# EAGLE board Arduino (EAGLE 9.6.2)

Size 100 x 80 mm. Coordinates in mm from the lower left corner, seen from the top.
Outline: 0,0 100,0 100,80 0,80 0,0
Copper layers (1*16): Top 0.035mm / dielectric 1.5mm / Bottom 0.035mm
Design rules "default": minimum track width 6mil, minimum drill 0.35mm, track to track 6mil, track to pad 6mil, pad to pad 6mil, via to via 6mil, smd to smd 6mil, copper to edge 40mil, drill to drill 6mil, minimum pad ring 10mil, minimum via ring 8mil, stop-mask expansion 4mil, vias tented up to drill 0mil, thermal gap 10mil
Net classes: 0 default: width 0.15 mm, drill 0.3 mm, clearance 0.15 mm

## Footprints (pad centres in the part's own frame; a part is rotated, then mirrored left to right if it is on the bottom)
1X08 = drill 1.016 long: 1 -8.89,0; 2 -6.35,0; 3 -3.81,0; 4 -1.27,0; 5 1.27,0; 6 3.81,0; 7 6.35,0; 8 8.89,0
C0603-ROUND = smd 0.898 x 1.1: 1 -0.889,0; 2 0.889,0
C0603 = smd 1.1 x 1: 1 -0.85,0; 2 0.85,0
SMB = smd 2.4 x 2.4: A 2.2,0; C -2.2,0
L1812 = smd 1.9 x 3.4: 1 -1.95,0; 2 1.95,0
SJ = smd 1.168 x 1.6: 1 -0.762,0; 2 0.762,0
SOT223 = smd 1.219 x 2.235: 1 -2.311,-3.099; 2 0,-3.099; 3 2.311,-3.099 | smd 3.6 x 2.2: 4 0,3.099
DPACK = smd 1 x 1.6: 1 -2.28,-4.8; 3 2.28,-4.8 | smd 5.4 x 6.2: 2 0,2.5
TQFP100 = smd 1.5 x 0.35: 1 -8,6; 2 -8,5.5; 3 -8,5; 4 -8,4.5; 5 -8,4; 6 -8,3.5; 7 -8,3; 8 -8,2.5; 9 -8,2; 10 -8,1.5; 11 -8,1; 12 -8,0.5; 13 -8,0; 14 -8,-0.5; 15 -8,-1; 16 -8,-1.5; 17 -8,-2; 18 -8,-2.5; 19 -8,-3; 20 -8,-3.5; 21 -8,-4; 22 -8,-4.5; 23 -8,-5; 24 -8,-5.5; 25 -8,-6; 51 8,-6; 52 8,-5.5; 53 8,-5; 54 8,-4.5; 55 8,-4; 56 8,-3.5; 57 8,-3; 58 8,-2.5; 59 8,-2; 60 8,-1.5; 61 8,-1; 62 8,-0.5; 63 8,0; 64 8,0.5; 65 8,1; 66 8,1.5; 67 8,2; 68 8,2.5; 69 8,3; 70 8,3.5; 71 8,4; 72 8,4.5; 73 8,5; 74 8,5.5; 75 8,6 | smd 0.35 x 1.5: 26 -6,-8; 27 -5.5,-8; 28 -5,-8; 29 -4.5,-8; 30 -4,-8; 31 -3.5,-8; 32 -3,-8; 33 -2.5,-8; 34 -2,-8; 35 -1.5,-8; 36 -1,-8; 37 -0.5,-8; 38 0,-8; 39 0.5,-8; 40 1,-8; 41 1.5,-8; 42 2,-8; 43 2.5,-8; 44 3,-8; 45 3.5,-8; 46 4,-8; 47 4.5,-8; 48 5,-8; 49 5.5,-8; 50 6,-8; 76 6,8; 77 5.5,8; 78 5,8; 79 4.5,8; 80 4,8; 81 3.5,8; 82 3,8; 83 2.5,8; 84 2,8; 85 1.5,8; 86 1,8; 87 0.5,8; 88 0,8; 89 -0.5,8; 90 -1,8; 91 -1.5,8; 92 -2,8; 93 -2.5,8; 94 -3,8; 95 -3.5,8; 96 -4,8; 97 -4.5,8; 98 -5,8; 99 -5.5,8; 100 -6,8
QFN32 = smd 0.6 x 0.3: 1 -2.3,1.75; 2 -2.3,1.25; 3 -2.3,0.75; 4 -2.3,0.25; 5 -2.3,-0.25; 6 -2.3,-0.75; 7 -2.3,-1.25; 8 -2.3,-1.75; 17 2.3,-1.75; 18 2.3,-1.25; 19 2.3,-0.75; 20 2.3,-0.25; 21 2.3,0.25; 22 2.3,0.75; 23 2.3,1.25; 24 2.3,1.75 | smd 0.3 x 0.6: 9 -1.75,-2.3; 10 -1.25,-2.3; 11 -0.75,-2.3; 12 -0.25,-2.3; 13 0.25,-2.3; 14 0.75,-2.3; 15 1.25,-2.3; 16 1.75,-2.3; 25 1.75,2.3; 26 1.25,2.3; 27 0.75,2.3; 28 0.25,2.3; 29 -0.25,2.3; 30 -0.75,2.3; 31 -1.25,2.3; 32 -1.75,2.3 | smd 3.2 x 3.2: EXP 0,0
SO08 = smd 0.6 x 2.2: 1 -1.905,-2.6; 2 -0.635,-2.6; 3 0.635,-2.6; 4 1.905,-2.6; 5 1.905,2.6; 6 0.635,2.6; 7 -0.635,2.6; 8 -1.905,2.6
SOT23-DBV = smd 0.55 x 1.2: 1 -0.95,-1.3; 2 0,-1.3; 3 0.95,-1.3; 4 0.95,1.3; 5 -0.95,1.3
2X03 = drill 1.016 octagon: 1 -2.54,-1.27; 2 -2.54,1.27; 3 0,-1.27; 4 0,1.27; 5 2.54,-1.27; 6 2.54,1.27
1X01 = drill 1.016 octagon: 1 0,0
CHIP-LED0805 = smd 1.2 x 1.2: A 0,-1.05; C 0,1.05
0805 = smd 1.2 x 1: 1 -1.1,0; 2 1.1,0
PANASONIC_D = smd 3 x 1.4: + 2.4,0; - -2.4,0
1X06 = drill 1.016 long: 1 -6.35,0; 2 -3.81,0; 3 -1.27,0; 4 1.27,0; 5 3.81,0; 6 6.35,0
QS = drill 0.61 long: 1 -2.54,0; 2 2.54,0
R0603-ROUND = smd 0.898 x 1.1: 1 -0.889,0; 2 0.889,0
TS42 = smd 1.6 x 1.4: 1 -4.2,2.25; 2 4.2,2.25; 3 -4.2,-2.25; 4 4.2,-2.25; 5 -4.2,0
CAT16 = smd 0.5 x 0.65: 1 -1.2,-0.675; 2 -0.4,-0.675; 3 0.4,-0.675; 4 1.2,-0.675; 5 1.2,0.675; 6 0.4,0.675; 7 -0.4,0.675; 8 -1.2,0.675
CAY16 = smd 0.5 x 0.65: 1 -1.2,-0.675; 2 -0.4,-0.675; 3 0.4,-0.675; 4 1.2,-0.675; 5 1.2,0.675; 6 0.4,0.675; 7 -0.4,0.675; 8 -1.2,0.675
SOT-23 = smd 0.787 x 0.889: 1 0.025,-1.016; 2 -0.94,1.016; 3 0.991,1.016
FIDUCIA-MOUNT = smd 1.016 x 1.016: P$1 0,0
DC-21MM = drill 3.302 pad 4.826 octagon: 1 -5.08,-3.353; 2 -0.076,-6.35; 3 -0.076,-0.356
PN61729 = drill 0.95 octagon: 1 1.25,4.71; 2 -1.25,4.71; 3 -1.25,2.71; 4 1.25,2.71 | drill 2.2: P$1 -6,0; P$2 6,0
2X08 = drill 1.016 octagon: 1 -8.89,-1.27; 2 -8.89,1.27; 3 -6.35,-1.27; 4 -6.35,1.27; 5 -3.81,-1.27; 6 -3.81,1.27; 7 -1.27,-1.27; 8 -1.27,1.27; 9 1.27,-1.27; 10 1.27,1.27; 11 3.81,-1.27; 12 3.81,1.27; 13 6.35,-1.27; 14 6.35,1.27; 15 8.89,-1.27; 16 8.89,1.27
RESONATOR = smd 0.7 x 2: 1 -1,0; 2 0,0; 3 1,0
CT/CN0603 = smd 1 x 1: 1 -1,0; 2 1,0

## Placement (x,y rotation side)
ADCH  [1X08]  -66.04,52.07 0 top  (outside the outline)
ADCL  [1X08]  -24.13,58.42 0 top  (outside the outline)
C1  22p  [C0603-ROUND]  -16.51,77.47 0 top  (outside the outline)
C2  100n  [C0603-ROUND]  -73.66,64.77 0 top  (outside the outline)
C3  100n  [C0603-ROUND]  -80.01,64.77 0 top  (outside the outline)
C4  100n  [C0603-ROUND]  -16.51,71.12 0 top  (outside the outline)
C5  100n  [C0603-ROUND]  -22.86,71.12 0 top  (outside the outline)
C6  100n  [C0603-ROUND]  -29.21,71.12 0 top  (outside the outline)
C7  100n  [C0603-ROUND]  -35.56,71.12 0 top  (outside the outline)
C8  100n  [C0603]  -62.23,76.2 0 top  (outside the outline)
C9  100n  [C0603-ROUND]  -41.91,71.12 0 top  (outside the outline)
C10  1u  [C0603-ROUND]  -59.69,71.12 0 top  (outside the outline)
C11  100n  [C0603]  -68.58,76.2 0 top  (outside the outline)
C12  100n  [C0603-ROUND]  -48.26,71.12 0 top  (outside the outline)
C13  100n  [C0603-ROUND]  -54.61,71.12 0 top  (outside the outline)
C14  22p  [C0603-ROUND]  -64.77,71.12 0 top  (outside the outline)
C15  22p  [C0603-ROUND]  -69.85,71.12 0 top  (outside the outline)
C16  22p  [C0603-ROUND]  -74.93,71.12 0 top  (outside the outline)
C17  22p  [C0603-ROUND]  -80.01,71.12 0 top  (outside the outline)
COMMUNICATION  [1X08]  -45.72,58.42 0 top  (outside the outline)
D1  M7  [SMB]  -60.96,35.56 0 top  (outside the outline)
F1  500mA  [L1812]  -60.96,45.72 0 top  (outside the outline)
GROUND  [SJ]  -20.32,81.28 0 top  (outside the outline)
IC1  MC33269ST-5.0T3  [SOT223]  -81.28,25.4 0 top  (outside the outline)
IC2  MC33269D-5.0  [DPACK]  -77.47,6.35 0 top  (outside the outline)
IC3  ATMEGA2560-16AU  [TQFP100]  -27.94,8.89 0 top  (outside the outline)
IC4  ATMEGA8U2-MU  [QFN32]  -53.34,25.4 0 top  (outside the outline)
IC5  LM358D  [SO08]  -63.5,24.13 0 top  (outside the outline)
IC6  LP2985-33DBVR  [SOT23-DBV]  -77.47,35.56 0 top  (outside the outline)
ICSP  ICSP  [2X03]  -29.21,25.4 0 top  (outside the outline)
ICSP1  ICSP  [2X03]  -38.1,25.4 0 top  (outside the outline)
JP1  [1X01]  -20.32,76.2 0 top  (outside the outline)
JP2  [1X01]  -25.4,76.2 0 top  (outside the outline)
JP3  [1X01]  -30.48,76.2 0 top  (outside the outline)
JP4  [1X01]  -35.56,76.2 0 top  (outside the outline)
L  YELLOW  [CHIP-LED0805]  -40.64,33.02 0 top  (outside the outline)
L1  BLM21  [0805]  -40.64,82.55 0 top  (outside the outline)
ON  GREEN  [CHIP-LED0805]  -67.31,43.18 0 top  (outside the outline)
PC1  47u  [PANASONIC_D]  -17.78,53.34 0 top  (outside the outline)
PC2  47u  [PANASONIC_D]  -26.67,53.34 0 top  (outside the outline)
POWER  [1X06]  -43.18,64.77 0 top  (outside the outline)
PWMH  [1X08]  -67.31,58.42 0 top  (outside the outline)
PWML  [1X08]  -24.13,64.77 0 top  (outside the outline)
Q1  16MHz  [QS]  -19.05,36.83 0 top  (outside the outline)
Q2  16MHz  [QS]  -31.75,36.83 0 top  (outside the outline)
R1  1M  [R0603-ROUND]  -63.5,64.77 0 top  (outside the outline)
R2  1M  [R0603-ROUND]  -67.31,64.77 0 top  (outside the outline)
R3  27R  [R0603-ROUND]  -54.61,64.77 0 top  (outside the outline)
R4  27R  [R0603-ROUND]  -59.69,64.77 0 top  (outside the outline)
RESET  TS42  [TS42]  -19.05,25.4 0 top  (outside the outline)
RESET-EN  [SJ]  -78.74,74.93 0 top  (outside the outline)
RN1  10K  [CAT16]  -33.02,53.34 0 top  (outside the outline)
RN2  22R  [CAY16]  -38.1,53.34 0 top  (outside the outline)
RN3  1k  [CAY16]  -43.18,53.34 0 top  (outside the outline)
RN4  1k  [CAY16]  -48.26,53.34 0 top  (outside the outline)
RN5  10K  [CAT16]  -53.34,53.34 0 top  (outside the outline)
RX  YELLOW  [CHIP-LED0805]  -46.99,33.02 0 top  (outside the outline)
T2  FDN340P  [SOT-23]  -77.47,43.18 0 top  (outside the outline)
TX  YELLOW  [CHIP-LED0805]  -53.34,33.02 0 top  (outside the outline)
U$2  FIDUCIALMOUNT  [FIDUCIA-MOUNT]  -45.72,82.55 0 top  (outside the outline)
U$3  FIDUCIALMOUNT  [FIDUCIA-MOUNT]  -49.53,82.55 0 top  (outside the outline)
U$4  FIDUCIALMOUNT  [FIDUCIA-MOUNT]  -53.34,82.55 0 top  (outside the outline)
U$5  FIDUCIALMOUNT  [FIDUCIA-MOUNT]  -57.15,82.55 0 top  (outside the outline)
UBOOT  [SJ]  -27.94,81.28 0 top  (outside the outline)
X1  DC21MMX  [DC-21MM]  -63.5,8.89 0 top  (outside the outline)
X2  [PN61729]  -45.72,11.43 0 top  (outside the outline)
XIOH  [2X08]  -24.13,44.45 0 top  (outside the outline)
XIOL  [2X08]  -45.72,44.45 0 top  (outside the outline)
Y1  16MHz  [RESONATOR]  -33.02,82.55 0 top  (outside the outline)
Y2  16MHz  [RESONATOR]  -36.83,82.55 0 top  (outside the outline)
Z1  PGB1010604  [CT/CN0603]  -45.72,77.47 0 top  (outside the outline)
Z2  PGB1010604  [CT/CN0603]  -55.88,77.47 0 top  (outside the outline)

## Library data of the parts
ADCH ADCL COMMUNICATION ICSP ICSP1 JP1-JP4 POWER PWMH PWML XIOH XIOL = pinhead
C1-C7 C9 C10 C12-C17 R1-R4 U$2-U$5 X2 Y1 Y2 = SmartPrj
C8 C11 F1 PC1 PC2 = rcl
D1 = diode
GROUND RESET-EN UBOOT = jumper
IC1 IC2 IC5 = linear
IC3 = atmel-2005
IC4 = atmel
IC6 = texas
L ON RX TX = led
L1 = wuerth-elektronik
Q1 Q2 = special
RESET = st-mod v1.4
RN1-RN5 = resistor-dil
T2 = zetex
X1 = powersupply
Z1 Z2 = varistor

## Nets
5-GND: RESET.5
+3V3: C13.2 IC5.6 IC6.5 POWER.2
+5V: C4.1 C5.1 C6.1 C9.1 C11.2 IC1.2 IC1.4 IC2.2 IC3.10 IC3.31 IC3.61 IC3.80 IC3.100 IC4.4 IC4.32 IC5.8 IC6.1 IC6.3 ICSP1.2 ICSP.2 JP1.1 JP2.1 PC2.+ POWER.3 RN1.6 RN1.7 RN1.8 RN3.3 RN4.5 RN4.6 RN5.1 T2.2
ADC0: ADCL.1 IC3.97
ADC1: ADCL.2 IC3.96
ADC2: ADCL.3 IC3.95
ADC3: ADCL.4 IC3.94
ADC4: ADCL.5 IC3.93
ADC5: ADCL.6 IC3.92
ADC6: ADCL.7 IC3.91
ADC7: ADCL.8 IC3.90
ADC8: ADCH.1 IC3.89
ADC9: ADCH.2 IC3.88
ADC10: ADCH.3 IC3.87
ADC11: ADCH.4 IC3.86
ADC12: ADCH.5 IC3.85
ADC13: ADCH.6 IC3.84
ADC14: ADCH.7 IC3.83
ADC15: ADCH.8 IC3.82
AREF: C3.1 IC3.98 PWMH.8
CMP: C12.2 IC5.5 RN5.3 RN5.7
D+: RN2.5 X2.3 Z2.2
D-: RN2.8 X2.2 Z1.2
DTR: C7.1 IC4.13 UBOOT.1
GATE_CMD: IC5.7 T2.3
GND: C1.2 C2.2 C3.2 C4.2 C5.2 C6.2 C8.2 C9.2 C11.1 C12.1 C13.1 C14.1 C15.1 C16.2 C17.2 GROUND.2 IC1.1 IC2.1 IC3.11 IC3.32 IC3.62 IC3.81 IC3.99 IC4.3 IC4.EXP IC5.2 IC5.3 IC5.4 IC6.2 ICSP1.6 ICSP.6 JP3.1 JP4.1 L.C ON.C PC1.- PC2.- POWER.4 POWER.5 PWMH.7 RESET.1 RESET.2 RN5.2 UBOOT.2 X1.1 X1.3 Y1.2 Y2.2
M8RXD: IC4.9 RN4.7
M8TXD: IC4.8 RN4.8
MISO2: IC4.17 ICSP1.1
MOSI2: IC4.16 ICSP1.4
N$2: L.A RN3.4
N$3: ON.A RN3.6
N$54: RN4.4 RX.A
N$55: RN4.3 TX.A
PA0: IC3.78 XIOH.16
PA1: IC3.77 XIOH.15
PA2: IC3.76 XIOH.14
PA3: IC3.75 XIOH.13
PA4: IC3.74 XIOH.12
PA5: IC3.73 XIOH.11
PA6: IC3.72 XIOH.10
PA7: IC3.71 XIOH.9
PB0: IC3.19 XIOL.1
PB1: IC3.20 ICSP.3 XIOL.2
PB2: IC3.21 ICSP.4 XIOL.3
PB3: IC3.22 ICSP.1 XIOL.4
PB4: IC3.23 PWMH.3
PB5: IC3.24 PWMH.4
PB6: IC3.25 PWMH.5
PB7: IC3.26 PWMH.6 RN3.5
PC0: IC3.53 XIOH.1
PC1: IC3.54 XIOH.2
PC2: IC3.55 XIOH.3
PC3: IC3.56 XIOH.4
PC4: IC3.57 XIOH.5
PC5: IC3.58 XIOH.6
PC6: IC3.59 XIOH.7
PC7: IC3.60 XIOH.8
PD7: IC3.50 XIOL.16
PE0: IC3.2 PWML.1 RN4.2
PE1: IC3.3 PWML.2 RN4.1
PE3: IC3.5 PWML.6
PE4: IC3.6 PWML.3
PE5: IC3.7 PWML.4
PG0: IC3.51 XIOL.13
PG1: IC3.52 XIOL.14
PG2: IC3.70 XIOL.15
PG5: IC3.1 PWML.5
PH3: IC3.15 PWML.7
PH4: IC3.16 PWML.8
PH5: IC3.17 PWMH.1
PH6: IC3.18 PWMH.2
PL0: IC3.35 XIOL.5
PL1: IC3.36 XIOL.6
PL2: IC3.37 XIOL.7
PL3: IC3.38 XIOL.8
PL4: IC3.39 XIOL.9
PL5: IC3.40 XIOL.10
PL6: IC3.41 XIOL.11
PL7: IC3.42 XIOL.12
PWRIN: D1.A X1.2
RD+: IC4.29 RN2.4
RD-: IC4.30 RN2.1
RESET: C1.1 C7.2 IC3.30 ICSP.5 POWER.1 RESET-EN.1 RESET-EN.2 RESET.3 RESET.4 RN1.1
RESET2: IC4.24 ICSP1.5 RN5.8
RXD1: COMMUNICATION.3 IC3.45
RXD2: COMMUNICATION.5 IC3.12
RXD3: COMMUNICATION.7 IC3.63
RXL: IC4.10 RX.C
SCK2: IC4.15 ICSP1.3
SCL: COMMUNICATION.1 IC3.43 RN1.2
SDA: COMMUNICATION.2 IC3.44 RN1.3
TXD1: COMMUNICATION.4 IC3.46
TXD2: COMMUNICATION.6 IC3.13
TXD3: COMMUNICATION.8 IC3.64
TXL: IC4.11 TX.C
UGND: C10.2 GROUND.1 IC4.28 L1.1 X2.4
USBVCC: C8.1 F1.1 IC4.31 T2.1
USHIELD: L1.2 X2.P$1 X2.P$2 Z1.1 Z2.1
VIN: C2.1 D1.C IC1.3 IC2.3 PC1.+ POWER.6 RN5.6
VUCAP: C10.1 IC4.27
XT1: C16.1 Q1.2 R2.1 R4.2 Y2.3
XT1R: IC4.1 R4.1
XT2: C17.1 IC4.2 Q1.1 R2.2 Y2.1
XTAL1: C14.2 Q2.2 R1.1 R3.2 Y1.3
XTAL1R: IC3.34 R3.1
XTAL2: C15.2 IC3.33 Q2.1 R1.2 Y1.1
XVCC: F1.2 X2.1

## Tracks (layer width: path | path; a pad name or v marks a point on that pad's centre or on a via)
+3V3  (3 unrouted)
+5V  (31 unrouted)
ADC0  (1 unrouted)
ADC1  (1 unrouted)
ADC2  (1 unrouted)
ADC3  (1 unrouted)
ADC4  (1 unrouted)
ADC5  (1 unrouted)
ADC6  (1 unrouted)
ADC7  (1 unrouted)
ADC8  (1 unrouted)
ADC9  (1 unrouted)
ADC10  (1 unrouted)
ADC11  (1 unrouted)
ADC12  (1 unrouted)
ADC13  (1 unrouted)
ADC14  (1 unrouted)
ADC15  (1 unrouted)
AREF  (2 unrouted)
CMP  (3 unrouted)
D+  (2 unrouted)
D-  (2 unrouted)
DTR  (2 unrouted)
GATE_CMD  (1 unrouted)
GND  (47 unrouted)
M8RXD  (1 unrouted)
M8TXD  (1 unrouted)
MISO2  (1 unrouted)
MOSI2  (1 unrouted)
N$2  (1 unrouted)
N$3  (1 unrouted)
N$54  (1 unrouted)
N$55  (1 unrouted)
PA0  (1 unrouted)
PA1  (1 unrouted)
PA2  (1 unrouted)
PA3  (1 unrouted)
PA4  (1 unrouted)
PA5  (1 unrouted)
PA6  (1 unrouted)
PA7  (1 unrouted)
PB0  (1 unrouted)
PB1  (2 unrouted)
PB2  (2 unrouted)
PB3  (2 unrouted)
PB4  (1 unrouted)
PB5  (1 unrouted)
PB6  (1 unrouted)
PB7  (2 unrouted)
PC0  (1 unrouted)
PC1  (1 unrouted)
PC2  (1 unrouted)
PC3  (1 unrouted)
PC4  (1 unrouted)
PC5  (1 unrouted)
PC6  (1 unrouted)
PC7  (1 unrouted)
PD7  (1 unrouted)
PE0  (2 unrouted)
PE1  (2 unrouted)
PE3  (1 unrouted)
PE4  (1 unrouted)
PE5  (1 unrouted)
PG0  (1 unrouted)
PG1  (1 unrouted)
PG2  (1 unrouted)
PG5  (1 unrouted)
PH3  (1 unrouted)
PH4  (1 unrouted)
PH5  (1 unrouted)
PH6  (1 unrouted)
PL0  (1 unrouted)
PL1  (1 unrouted)
PL2  (1 unrouted)
PL3  (1 unrouted)
PL4  (1 unrouted)
PL5  (1 unrouted)
PL6  (1 unrouted)
PL7  (1 unrouted)
PWRIN  (1 unrouted)
RD+  (1 unrouted)
RD-  (1 unrouted)
RESET  (9 unrouted)
RESET2  (2 unrouted)
RXD1  (1 unrouted)
RXD2  (1 unrouted)
RXD3  (1 unrouted)
RXL  (1 unrouted)
SCK2  (1 unrouted)
SCL  (2 unrouted)
SDA  (2 unrouted)
TXD1  (1 unrouted)
TXD2  (1 unrouted)
TXD3  (1 unrouted)
TXL  (1 unrouted)
UGND  (4 unrouted)
USBVCC  (3 unrouted)
USHIELD  (4 unrouted)
VIN  (6 unrouted)
VUCAP  (1 unrouted)
XT1  (4 unrouted)
XT1R  (1 unrouted)
XT2  (4 unrouted)
XTAL1  (4 unrouted)
XTAL1R  (1 unrouted)
XTAL2  (4 unrouted)
XVCC  (1 unrouted)